# Altium PCB driverV1.2.PcbDoc (part 1 of 2)
Units mil, origin at the board's own origin, x right, y up, seen from the top; angles counter-clockwise.
Board outline 6000 x 4000 mil, 2 copper layers (Top Layer, Bottom Layer); 172 components, 108 nets, 481 pads, 590 vias.
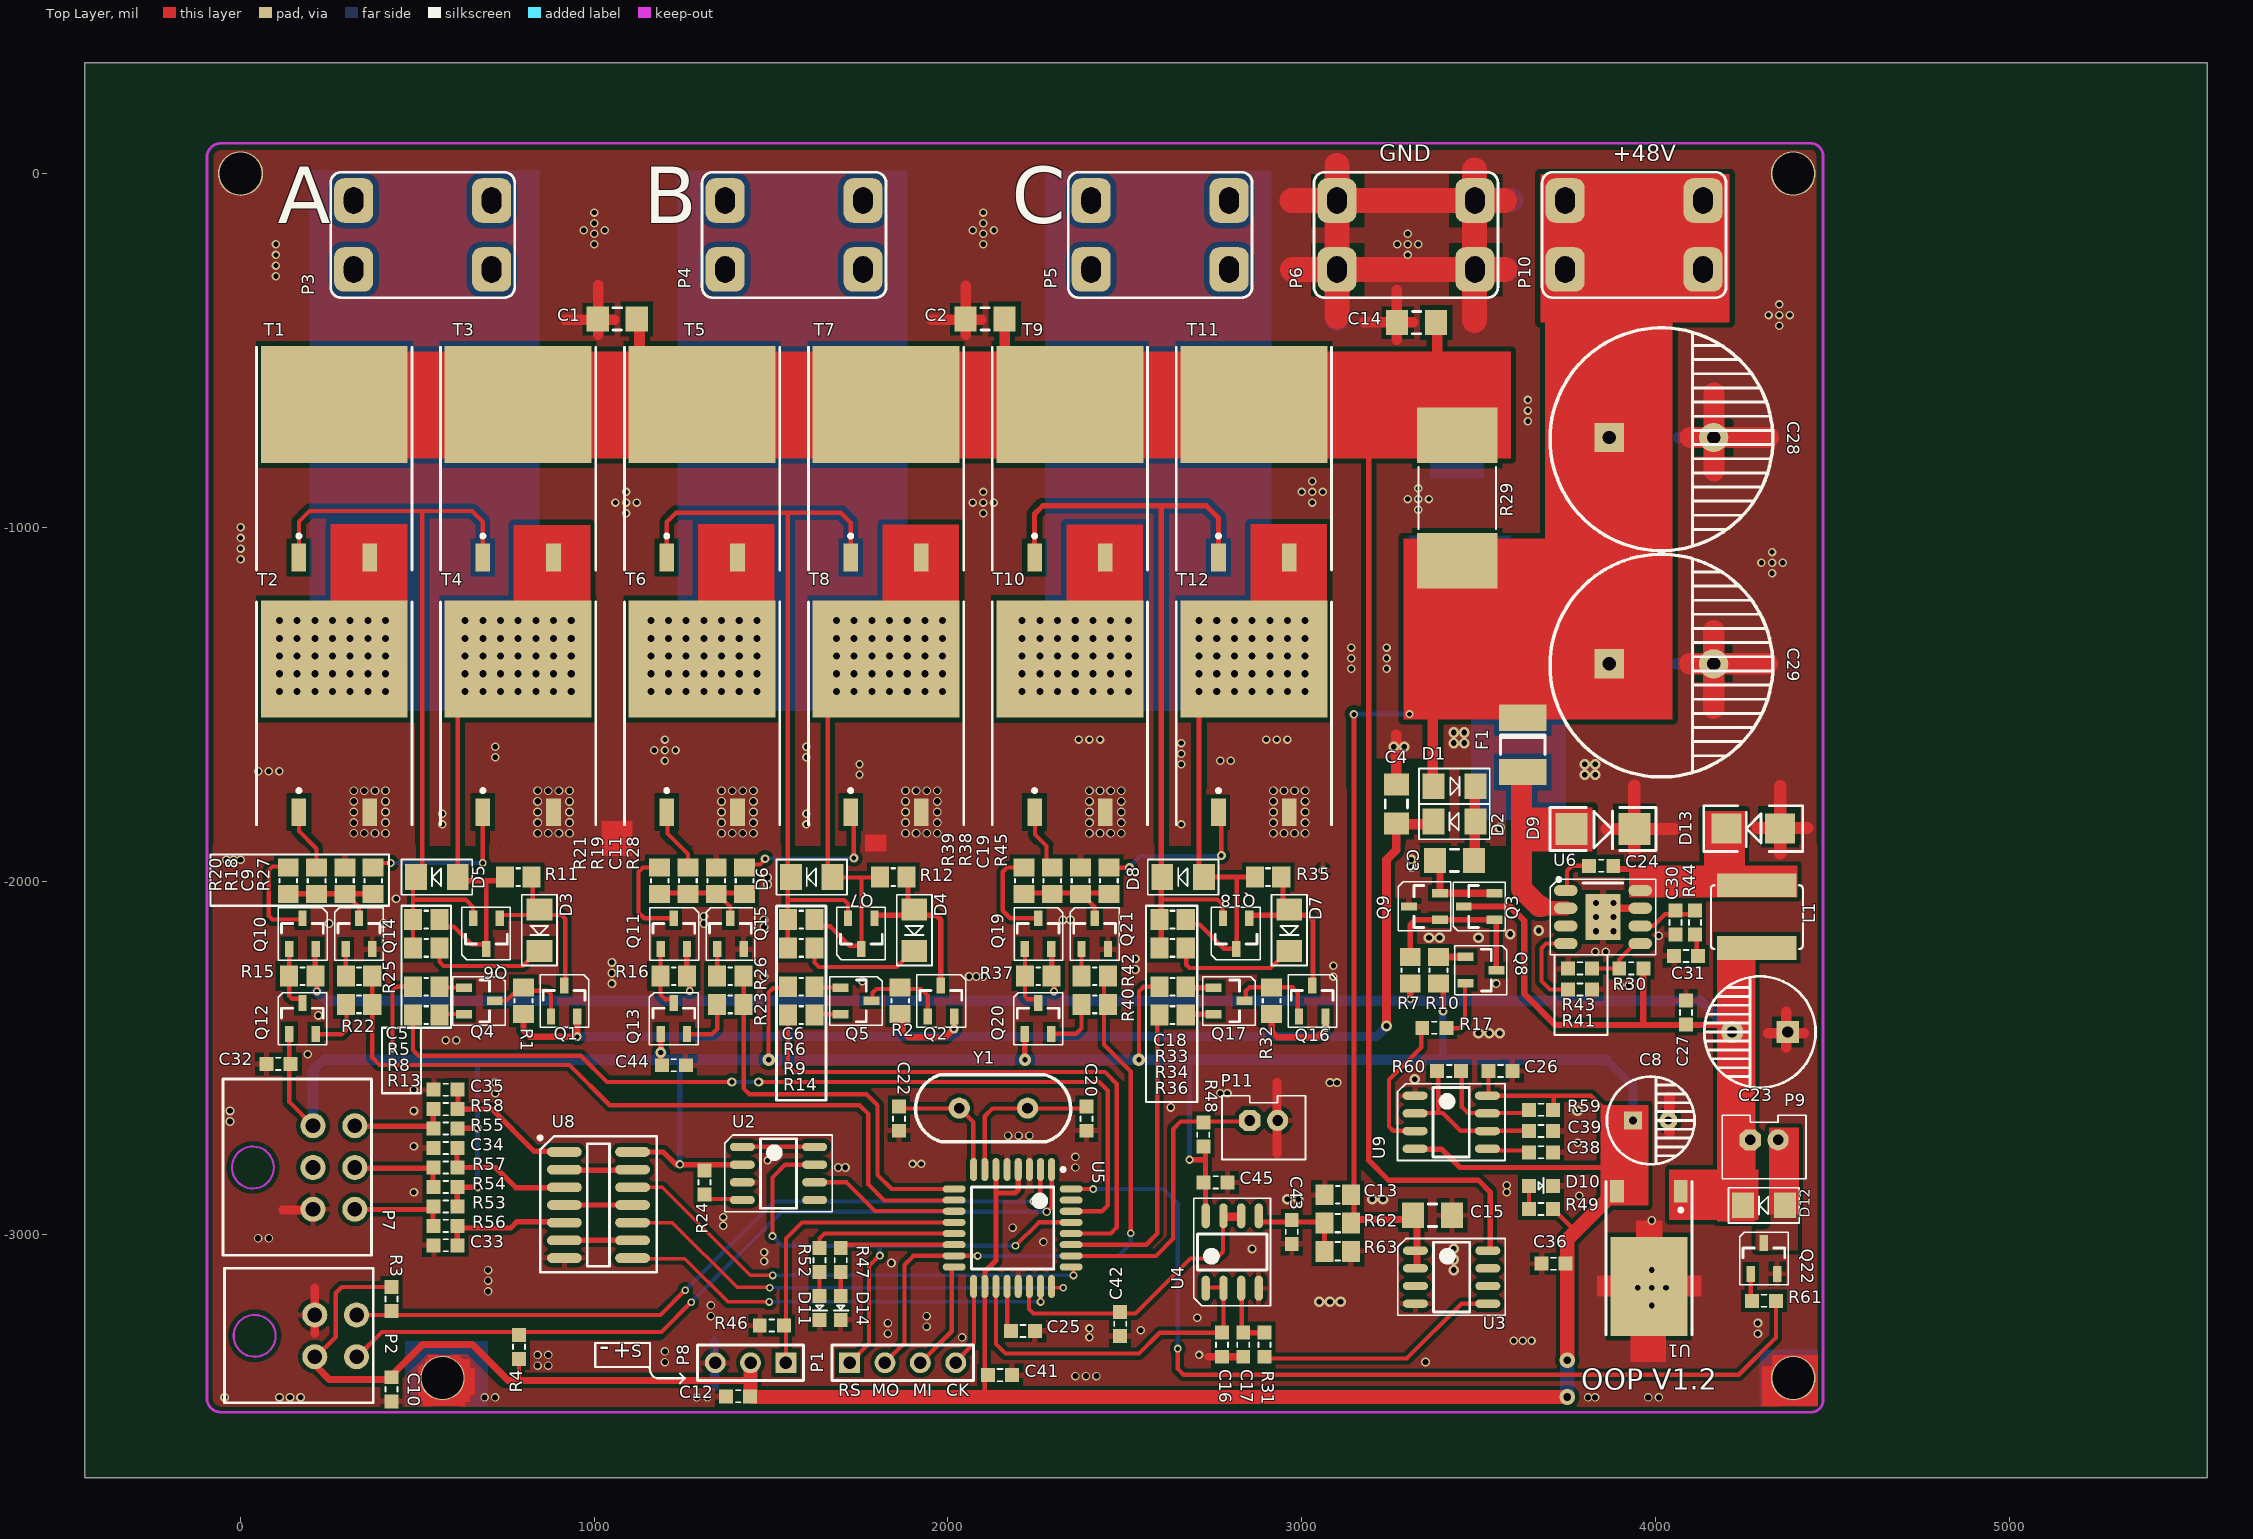
[diagram p0: Top Layer view]
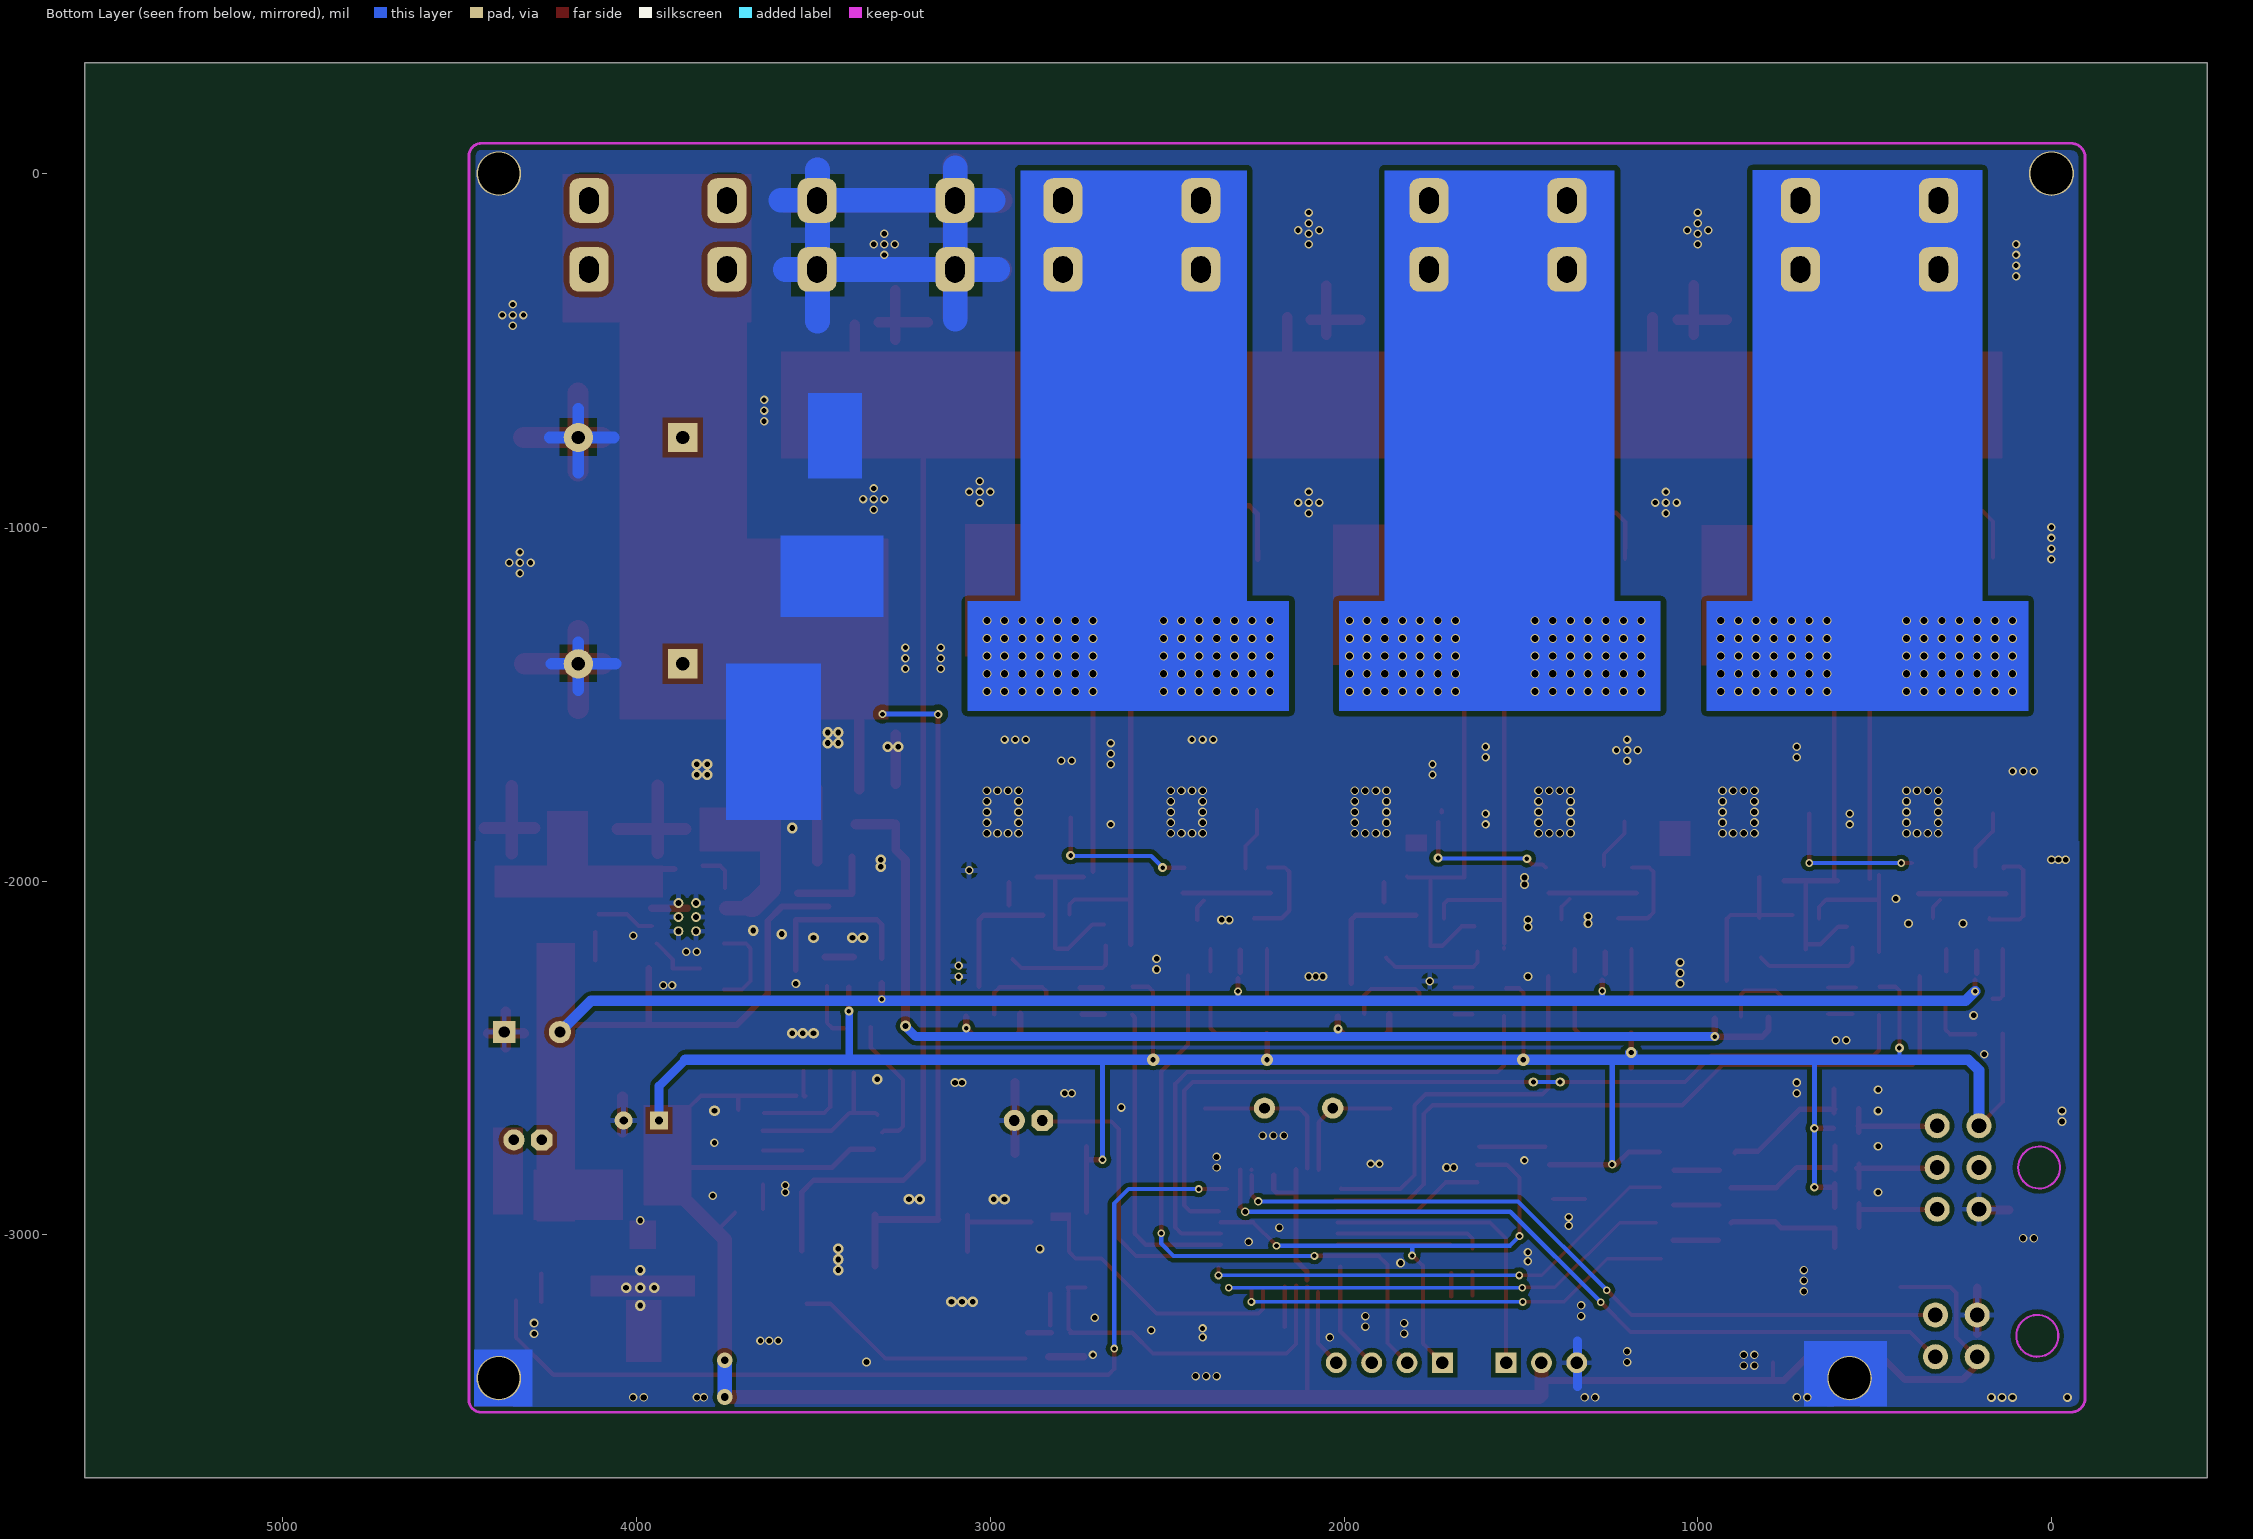
[diagram p1: Bottom Layer view, seen from below]

## Layer stack, top to bottom
Top Solder: solder mask 0.4, Solder Resist, Dk 3.5
Top Layer: signal copper 1.4
Dielectric1: dielectric 12.6, FR-4, Dk 4.8
Bottom Layer: signal copper 1.4
Bottom Solder: solder mask 0.4, Solder Resist, Dk 3.5

## Board outline
-440,-3687 5560,-3687 5560,313 -440,313

## Design rules (kind name [scope] priority, off if disabled: settings)
Clearance [All] p1 off: gap=15
ComponentClearance [All] p1 off: gap=0 collisioncheckmode=3 verticalgap=0 showdistances=FALSE
FabricationTestPointUsage TestPointUsage [All] p1: valid=0 allowmultiple=FALSE
FabricationTestpoint Testpoint [All] p1: side=3 testpointundercomponent=TRUE minsize=40 maxsize=100 preferedsize=60 minholesize=0 maxholesize=40 preferedholesize=32 testpointgrid=1 allowsidetop=TRUE allowsidebottom=TRUE usegrid=TRUE gridtolerance=0.01
HoleSize [All] p1: absolutevalues=TRUE maxlimit=200 minlimit=1 maxpercent=80.000 minpercent=20.000
PolygonConnect [All] p1: connectstyle=Direct reliefconductorwidth=15 reliefentries=4 polygonreliefangle="90 Angle" airgapwidth=10
RoutingVias [All] p1: holewidth=13 width=22 viastyle="Through Hole" minholewidth=10 minwidth=15 maxholewidth=200 maxwidth=250
SolderMaskExpansion [All] p1: expansion=4
Width [All] p1: maxlimit=150 minlimit=10 preferedwidth=10 minimp=50.000000 maximp=50.000000 favimp=50.000000
26 further rules are at their usual default settings.

## Components (designator, comment, footprint, x,y, rotation, side; value= is the part's Value field where it differs from the comment)
C1 "Cap" 3216[1206] 1065,-411 r180 top
C2 "Cap" 3216[1206] 2105,-411 r180 top
C3 "Cap" 3216[1206] 3432,-1942 r180 top
C4 "Cap" 3216[1206] 3267.71,-1782 r90 top
C5 "Cap" R0805 525,-2109 r0 top
C6 "Cap" R0805 1585,-2109 r0 top
C8 "Cap Pol1" C6.3*12 4037,-2677 r180 top
C9 "Cap" R0805 295,-1999 r270 top
C10 "Cap" 0603 427,-3437 r90 top
C11 "Cap" R0805 1345,-1999 r270 top
C12 "Cap" 0603 1407,-3457 r0 top
C13 "Cap" R0805 3102,-2887 r0 top
C14 "Cap" 3216[1206] 3325,-421 r180 top
C15 "Cap" 3216[1206] 3370,-2945 r0 top
C16 "Cap" 0603 2775,-3311 r90 top
C17 "Cap" 0603 2835,-3311 r90 top
C18 "Cap" R0805 2635,-2109 r0 top
C19 "Cap" R0805 2375,-1999 r270 top
C20 "Cap" 0603 2392,-2672 r270 top
C22 "Cap" 0603 1862,-2672 r270 top
C23 "Cap Pol3" C8x4 4217,-2427 r0 top
C24 "Cap" 0603 3847,-1957 r180 top
C25 "Cap" 0603 2212,-3272 r0 top
C26 "Cap" 0603 3562,-2537 r180 top
C27 "Cap" 0603 4087,-2372 r90 top
C28 "Cap Pol1" C16-7.5 4165,-1386 r180 top
C29 "Cap Pol1" C16-7.5 4165,-746 r180 top
C30 "Cap" 0603 4057,-2117 r270 top
C31 "Cap" 0603 4087,-2212 r0 top
C32 "Cap" 0603 107,-2517 r180 top
C33 "Cap" 0603 580,-3030 r0 top
C34 "Cap" 0603 580,-2755 r0 top
C35 "Cap" 0603 580,-2590 r0 top
C36 "Cap" 0603 3712,-3082 r180 top
C38 "Cap" 0603 3677,-2767 r0 top
C39 "Cap" 0603 3677,-2707 r0 top
C41 "Cap" 0603 2147,-3397 r180 top
C42 "Cap" 0603 2487,-3252 r90 top
C43 "Cap" 0603 2972,-2992 r90 top
C44 "Cap" 0603 1225,-2521 r180 top
C45 "Cap" 0603 2757,-2852 r180 top
D1 "Diode" LL34 3432,-1732 r0 top
D2 "Diode" LL34 3432,-1832 r180 top
D3 "Diode" LL34 845,-2139 r270 top
D4 "Diode" LL34 1905,-2139 r270 top
D5 "Zener diode" LL34 555,-1989 r180 top
D6 "Zener diode" LL34 1615,-1989 r180 top
D7 "Diode" LL34 2965,-2139 r270 top
D8 "Zener diode" LL34 2665,-1989 r180 top
D9 "SMBJ45CA" SMB 3852,-1852 r0 top
D10 "WORK" 0603-LED 3677,-2862 r0 top
D11 "FALT" 0603-LED 1637,-3207 r270 top
D12 "Diode" LL34 4307,-2917 r180 top
D13 "SS54" SMA 4277,-1852 r180 top
D14 "FALT" 0603-LED 1697,-3207 r270 top
F1 "Fuse Thermal" 1812 3625,-1615 r270 top
L1 "Inductor" L-6045 4287,-2012 r270 top
P1 "PROG" HDR1X4 1722,-3362 r0 top
P2 "ENC" 5557-4-SMALL 210,-3345 r270 top
P3 "M5" M4 710,-76 r180 top
P4 "M5" M4 1760,-76 r180 top
P5 "M5" M4 2795,-76 r180 top
P6 "M5" M4 3490,-76 r180 top
P7 "HALL" 5557-6-small 205,-2810 r270 top
P8 "S1" HDR1X3 1542,-3362 r180 top
P9 "FAN" PH2.0-2P 4347,-2732 r0 top
P10 "M5" M4 4135,-76 r180 top
P11 "RT" PH2.0-2P 2932,-2677 r0 top
Q1 "PNP" SOT-23-PNP 915,-2339 r0 top
Q2 "PNP" SOT-23-PNP 1980,-2339 r0 top
Q3 "NPN" SOT-23-NPN 3502,-2072 r90 top
Q4 "NPN" SOT-23-NPN 675,-2339 r270 top
Q5 "NPN" SOT-23-NPN 1740,-2339 r270 top
Q6 "PNP" SOT-23-PNP 695,-2149 r180 top
Q7 "PNP" SOT-23-PNP 1755,-2149 r180 top
Q8 "NPN" SOT-23-NPN 3507,-2252 r270 top
Q9 "PNP" SOT-23-PNP 3347,-2072 r90 top
Q10 "PNP" SOT-23-PNP 175,-2149 r0 top
Q11 "PNP" SOT-23-PNP 1225,-2149 r0 top
Q12 "NPN" SOT-23-NPN 175,-2389 r0 top
Q13 "NPN" SOT-23-NPN 1225,-2389 r0 top
Q14 "NPN" SOT-23-NPN 335,-2149 r0 top
Q15 "NPN" SOT-23-NPN 1385,-2149 r0 top
Q16 "PNP" SOT-23-PNP 3030,-2339 r0 top
Q17 "NPN" SOT-23-NPN 2795,-2339 r270 top
Q18 "PNP" SOT-23-PNP 2815,-2149 r180 top
Q19 "PNP" SOT-23-PNP 2255,-2149 r0 top
Q20 "NPN" SOT-23-NPN 2255,-2389 r0 top
Q21 "NPN" SOT-23-NPN 2415,-2149 r0 top
Q22 "NPN" SOT-23-NPN 4307,-3067 r0 top
R1 "Res1" R0805 800,-2339 r270 top
R2 "Res1" R0805 1865,-2339 r270 top
R3 "Res1" 0603 427,-3182 r270 top
R4 "Res1" 0603 787,-3317 r90 top
R5 "Res1" R0805 525,-2189 r180 top
R6 "Res1" R0805 1585,-2189 r180 top
R7 "Res1" R0805 3307,-2252 r270 top
R8 "Res1" R0805 525,-2299 r180 top
R9 "Res1" R0805 1585,-2299 r180 top
R10 "Res1" R0805 3387,-2252 r270 top
R11 "Res1" R0805 785,-1989 r0 top
R12 "Res1" R0805 1845,-1989 r0 top
R13 "Res1" R0805 525,-2379 r0 top
R14 "Res1" R0805 1585,-2379 r0 top
R15 "Res1" R0805 175,-2269 r180 top
R16 "Res1" R0805 1225,-2269 r180 top
R17 "Res1" 0603 3375,-2415 r0 top
R18 "Res1" R0805 215,-1999 r270 top
R19 "Res1" R0805 1265,-1999 r270 top
R20 "Res1" R0805 135,-1999 r270 top
R21 "Res1" R0805 1185,-1999 r270 top
R22 "Res1" R0805 335,-2349 r180 top
R23 "Res1" R0805 1385,-2349 r180 top
R24 "Res1" 0603 1312,-2852 r90 top
R25 "Res1" R0805 335,-2269 r0 top
R26 "Res1" R0805 1385,-2269 r0 top
R27 "Res1" R0805 375,-1999 r270 top
R28 "Res1" R0805 1425,-1999 r270 top
R29 "" 3920 3440,-740 r270 top
R30 "Res1" 0603 3932,-2247 r0 top
R31 "Res1" 0603 2895,-3311 r270 top
R32 "Res1" R0805 2915,-2339 r270 top
R33 "Res1" R0805 2635,-2189 r180 top
R34 "Res1" R0805 2635,-2299 r180 top
R35 "Res1" R0805 2905,-1989 r0 top
R36 "Res1" R0805 2635,-2379 r0 top
R37 "Res1" R0805 2255,-2269 r180 top
R38 "Res1" R0805 2295,-1999 r270 top
R39 "Res1" R0805 2215,-1999 r270 top
R40 "Res1" R0805 2415,-2349 r180 top
R41 "Res1" 0603 3787,-2307 r0 top
R42 "Res1" R0805 2415,-2269 r0 top
R43 "Res1" 0603 3787,-2247 r0 top
R44 "Res1" 0603 4112,-2117 r270 top
R45 "Res1" R0805 2455,-1999 r270 top
R46 "Res1" 0603 1502,-3257 r180 top
R47 "Res1" 0603 1697,-3072 r90 top
R48 "Res1" 0603 2722,-2717 r270 top
R49 "Res1" 0603 3677,-2927 r0 top
R52 "Res1" 0603 1637,-3072 r90 top
R53 "Res Semi" 0603 580,-2920 r0 top
R54 "Res Semi" 0603 580,-2865 r0 top
R55 "Res Semi" 0603 580,-2700 r0 top
R56 "Res Semi" 0603 580,-2975 r180 top
R57 "Res Semi" 0603 580,-2810 r180 top
R58 "Res Semi" 0603 580,-2645 r180 top
R59 "Res1" 0603 3677,-2647 r0 top
R60 "Res1" 0603 3417,-2537 r0 top
R61 "Res Semi" 0603 4307,-3187 r0 top
R62 "Res1" 0805 3102,-2967 r0 top
R63 "Res1" 0805 3102,-3047 r0 top
T1 "CSD19536" D2PAK 265,-869 r0 top
T2 "CSD19536" D2PAK 265,-1589 r0 top
T3 "CSD19536" D2PAK 785,-869 r0 top
T4 "CSD19536" D2PAK 785,-1589 r0 top
T5 "CSD19536" D2PAK 1305,-869 r0 top
T6 "CSD19536" D2PAK 1305,-1589 r0 top
T7 "CSD19536" D2PAK 1825,-869 r0 top
T8 "CSD19536" D2PAK 1825,-1589 r0 top
T9 "CSD19536" D2PAK 2345,-869 r0 top
T10 "CSD19536" D2PAK 2345,-1589 r0 top
T11 "CSD19536" D2PAK 2865,-869 r0 top
T12 "CSD19536" D2PAK 2865,-1589 r0 top
U1 "L7805ACD2T-TR" TO-252 3962,-3097 r180 top
U2 "MAX706RCSA" SOIC8 1522,-2827 r0 top
U3 "MAX4080T" SOIC8 3425,-3120 r0 top
U4 "LM358D" SOIC8 2804,-3048 r90 top
U5 "ATmega8-16AC" 32A_N 2183,-2981 r270 top
U6 "TPS54360" SOP8-POW 3852,-2102 r0 top
U8 "MC74HC14AD" 751A 1012,-2916 r0 top
U9 "NE555D" SOIC8 3424,-2682 r0 top
Y1 "XTAL(8M)" 49SD 2032,-2642 r0 top

## Footprints (in the part's own frame and the unit in brackets; to place one, negate y for a bottom-side part, rotate by r counter-clockwise, add the part's x,y. Pads: shape width x height; smd on the part's side, far side on the other; paste and mask are expansions set on the pad)
32A_N [mm] "32-Pin Thin Quad Flat Pack 0.8 mm Pitch, IPC Medium Density"
  oval 1.65x0.508 smd: 1(-4.2,2.8) 2(-4.2,2) 3(-4.2,1.2) 4(-4.2,0.4) 5(-4.2,-0.4) 6(-4.2,-1.2) 7(-4.2,-2) 8(-4.2,-2.8) 17(4.2,-2.8) 18(4.2,-2) 19(4.2,-1.2) 20(4.2,-0.4) 21(4.2,0.4) 22(4.2,1.2) 23(4.2,2) 24(4.2,2.8)
  oval 0.508x1.65 smd: 9(-2.8,-4.2) 10(-2,-4.2) 11(-1.2,-4.2) 12(-0.4,-4.2) 13(0.4,-4.2) 14(1.2,-4.2) 15(2,-4.2) 16(2.8,-4.2) 25(2.8,4.2) 26(2,4.2) 27(1.2,4.2) 28(0.4,4.2) 29(-0.4,4.2) 30(-1.2,4.2) 31(-2,4.2) 32(-2.8,4.2)
  silkscreen extent -4.32,-2.95 2.95,3.75, body extent -3.5,-3.5 3.5,3.5, height 1.2
49SD [mil]
  round 60 hole 30: 1(0,0) 2(193,0)
  silkscreen extent -124,-95 315,94
0603 [mm]
  rect 1x1 smd: 1(-0.864,0) 2(0.864,0)
  silkscreen extent -0.18,-0.43 0.18,0.43
0603-LED [mm]
  rect 1x1 smd: 1(-0.864,0) 2(0.864,0)
  silkscreen extent -0.18,-0.51 0.18,0.56
751A [mm]
  oval 2.5x0.7 smd: 1(-2.45,3.81) 2(-2.45,2.54) 3(-2.45,1.27) 4(-2.45,0) 5(-2.45,-1.27) 6(-2.45,-2.54) 7(-2.45,-3.81) 8(2.45,-3.81) 9(2.45,-2.54) 10(2.45,-1.27) 11(2.45,0) 12(2.45,1.27) 13(2.45,2.54) 14(2.45,3.81)
  silkscreen extent -4.31,-4.83 4.19,4.95, body extent -2,-4.38 2,4.38, height 1.75
0805 [mm]
  rect 1.3x1.5 smd: 1(-0.95,0) 2(0.95,0)
  silkscreen extent -0.15,-0.66 0.15,0.66
1812 [mm] "Chip Capacitor; Body 4.5 x 3.2 mm (LxW typ)"
  rect 1.9x3.4 smd: 1(-1.95,0) 2(1.95,0)
  silkscreen extent -0.7,-1.6 0.7,1.6
3216[1206] [mm] "Chip Resistor; Body 3.2 x 1.6 mm (LxW typ)"
  rect 1.6x1.8 smd: 1(-1.4,0) 2(1.4,0)
  silkscreen extent -0.3,-0.8 0.3,0.8
3920 [mm]
  rect 4x5.8 smd: 1(0,0) 2(9,0)
  silkscreen extent 2.29,-2.79 6.73,2.79
5557-4-SMALL [mm]
  round 1.8 hole 1.05: 1(0,0) 2(-3,0) 3(-3,3) 4(0,3)
  Keep-Out Layer circle w0.152: c-1.5,-4.32 r1.505
  silkscreen extent -6.35,-6.48 3.3,4.19
5557-6-small [mm]
  round 1.8 hole 1.05: 1(3,0) 2(0,0) 3(-3,0) 4(-3,3) 5(0,3) 6(3,3)
  Keep-Out Layer circle w0.152: c0,-4.32 r1.505
  silkscreen extent -6.35,-6.48 6.3,4.19
C6.3*12 [mm]
  rect 1.3x1.3 hole 0.6: 1(2.54,0)
  round 1.3 hole 0.6: 2(0,0)
  silkscreen extent -1.88,-3.15 4.42,3.15
C8x4 [mm]
  round 1.6 hole 0.8: 1(0,0)
  rect 1.6x1.6 hole 0.8: 2(4,0)
  silkscreen extent -2,-4 6,4
C16-7.5 [mm]
  rect 2.1x2.1 hole 0.95: 1(7.5,0)
  round 2.1 hole 0.95: 2(0,0)
  silkscreen extent -4.25,-7.87 11.75,8.12
D2PAK [mm] "D2-PAK/TO-263-AB; 3 Leads (1 Cropped); Body 15.5 (inc. leads) x 10.5 mm (LxW max)"
  rect 1.05x2 smd: 1(-2.54,-5.5) 3(2.54,-5.5)
  rect 10.55x8.4 smd: 2(0,5.5)
  silkscreen extent -5.58,-6.4 5.58,9.6
HDR1X3 [mm] "Connector; Header; 3 Position"
  rect 1.5x1.5 hole 0.9: 1(0,0)
  round 1.5 hole 0.9: 2(2.54,0) 3(5.08,0)
  silkscreen extent -1.27,-1.27 6.35,1.27
HDR1X4 [mm] "Connector; Header; 4 Position"
  rect 1.5x1.5 hole 0.9: 1(0,0)
  round 1.5 hole 0.9: 2(2.54,0) 3(5.08,0) 4(7.62,0)
  silkscreen extent -1.27,-1.27 8.89,1.27
L-6045 [mm]
  rect 1.7x5.7 smd: 1(0,0) 2(4.5,0)
  silkscreen extent 0,-3.3 4.57,3.3
LL34 [mm] "MELF Diode, 2-Leads, Body 3.3x1.6mm, IPC Medium Density"
  rect 1.575x1.85 smd: 1(-1.5,0) 2(1.5,0)
  silkscreen extent -2.54,-1.27 2.54,1.27, body extent -1.65,-0.82 1.65,0.82, height 1.65
M4 [mm]
  rrect50% 2.8x3.2 hole 1.4 slot 1.9 at 90 deg: 1(0,4.953) 1(0,0) 1(9.906,0) 1(9.906,4.953)
  silkscreen extent -1.65,-2.03 11.56,6.99
PH2.0-2P [mil]
  oct 60x60 hole 30: 1(-78.74,0)
  round 60 hole 30: 2(0,0)
  silkscreen extent -157,-110 79,70
R0805 [mm] "Chip Resistor, 2-Leads, Body 2.0x1.3mm, IPC Medium Density"
  rect 1.298x1.501 smd: 1(-0.95,0) 2(0.95,0)
  silkscreen extent -0.13,-0.64 0.13,0.64
SMA [mm] "Molded Diode, 2-Leads, Body 4.3x2.7mm, IPC Medium Density"
  rect 2.15x2.15 smd: 1(-1.93,0) 2(1.93,0)
  silkscreen extent -3.56,-1.65 3.56,1.65, body extent -2.28,-1.42 2.29,1.42, height 2.95
SMB [mm]
  rect 2.3x2.3 smd: 1(-2.25,-0.025) 2(2.25,-0.025)
  silkscreen extent -3.8,-1.58 3.81,1.52
SOIC8 [mm]
  oval 1.8x0.6 smd: 1(-2.625,1.905) 2(-2.625,0.635) 3(-2.625,-0.635) 4(-2.625,-1.905) 5(2.575,-1.905) 6(2.575,-0.635) 7(2.575,0.635) 8(2.575,1.905)
  silkscreen extent -3.89,-2.74 3.84,2.77, body extent -2.03,-2.5 1.97,2.5, height 1.76
SOP8-POW [mm]
  round 0.715 hole 0.45: 0(-0.508,-1.016) 0(-0.508,0) 0(-0.508,1.016) 0(0.762,-1.016) 0(0.762,0) 0(0.762,1.016)
  rect 2.54x3.302 smd: 0(0,0)
  oval 1.7x0.8 smd: 1(-2.675,1.905) 2(-2.675,0.635) 3(-2.675,-0.635) 4(-2.675,-1.905) 5(2.675,-1.905) 6(2.675,-0.635) 7(2.675,0.635) 8(2.675,1.905)
  silkscreen extent -3.78,-2.7 3.77,2.82
SOT-23-NPN [mm]
  rect 0.6x1.143 smd: 1(0.95,-1.108) 2(-0.95,-1.108) 3(0,1.108)
  silkscreen extent -1.75,-1.89 1.75,1.87, body extent -1.5,-0.66 1.5,0.74, height 1.1
SOT-23-PNP [mm]
  rect 0.6x1.143 smd: 1(0.95,-1.108) 2(-0.95,-1.108) 3(0,1.108)
  silkscreen extent -1.73,-1.89 1.78,1.87, body extent -1.5,-0.66 1.5,0.74, height 1.1
TO-252 [mm]
  rect 1x1.6 smd: 1(-2.793,-5.584) 3(1.777,-5.584)
  rect 5.5x7.1 smd: 4(-0.508,1.266)
  silkscreen extent -3.59,-6.28 2.58,4.72

## Part data
C1 C2 C3 C4 C5 C6 C9 C10 C11 C12 C13 C14 C15 C16 C17 C18 C19 C20 C22 C24 C25 C26 C27 C30 C31 C32 C33 C34 C35 C36 C38 C39 C41 C42 C43 C44 C45: "Capacitor"
C8 C28 C29: "Polarized Capacitor (Radial)"
C23: library part Cap, "Capacitor"
D1 D2 D3 D4 D7 D12: library part "Diode 1N5408", "3 Amp Medium Power Silicon Rectifier Diode"
D5 D6 D8: library part "D Zener", "Zener Diode"
D9: library part NUP2105L
D10 D11 D14: library part LED2, "Typical RED, GREEN, YELLOW, AMBER GaAs LED"
D13: library part "Diode BAS16", "Silicon Switching Diode for High-Speed Switching"
F1: "Thermal Fuse"
L1: library part B82793S0513N201
P1 P7: library part "Header 5", "Header, 5-Pin"
P2: library part "Header 4", "Header, 4-Pin"
P6 P9 P11: library part "Header 2", "Header, 2-Pin"
P8: library part "Header 3", "Header, 3-Pin"
Q1 Q2 Q6 Q7 Q9 Q10 Q11 Q16 Q18 Q19: library part 2N5401, "PNP General Purpose Amplifier"
Q3 Q4 Q5 Q8 Q12 Q13 Q14 Q15 Q17 Q20 Q21 Q22: library part 2N5551, "NPN General Purpose Amplifier"
R1 R2 R3 R4 R5 R6 R7 R8 R9 R10 R11 R12 R13 R14 R15 R16 R17 R18 R19 R20 R21 R22 R23 R24 R25 R26 R27 R28 R30 R31 R32 R33 R34 R35 R36 R37 R38 R39 R40 R42 R45 R46 R47 R48 R49 R52 R59 R60 R62 R63: "Resistor"
R29: library part Res1, "Resistor"
R41 R43 R44: library part "Res Semi", "Semiconductor Resistor"
R53 R54 R55 R56 R57 R58 R61: "Semiconductor Resistor"
T1 T2 T3 T4 T5 T6 T7 T8 T9 T10 T11 T12: library part IRF644S, "HEXFET N-Channel Power MOSFET"
U1: library part MC78M05ACDTRK, "Three-Terminal Medium Current Positive Voltage Regulator"
U2: "+3V Voltage Monitoring, Low-Cost, µP Supervisory Circuit"
U3: library part MAX4080
U4: "Dual Low-Power Operational Amplifier"
U5: "8-Bit AVR Microcontroller with 8K Bytes of In-System Programmable Flash Memory"
U6: library part TJA1040
U8: "Hex Schmitt-Trigger Inverter"
U9: "Precision Timer"
Y1: library part XTAL, "Crystal Oscillator"

## Free pads (board coordinates)
  round 125.98 hole 118.11: 0(570.87,-3405.51) 1(4389.76,-3405.51) 2(4389.76,0)
  oval 127.17x125.98 hole 118.11: 3(0,0)

## Via types
v1: diameter 25, hole 20, Top Layer to Bottom Layer, 210 vias
v2: diameter 24, hole 15, Top Layer to Bottom Layer, 121 vias
v3: diameter 25, hole 18, Top Layer to Bottom Layer, 84 vias
v4: diameter 25, hole 16, Top Layer to Bottom Layer, 57 vias
v5: diameter 30, hole 16, Top Layer to Bottom Layer, 38 vias
v6: diameter 24, hole 17, Top Layer to Bottom Layer, 36 vias
v7: diameter 22, hole 13, Top Layer to Bottom Layer, 21 vias
v8: diameter 25, hole 13, Top Layer to Bottom Layer, 9 vias
v9: diameter 35, hole 15, Top Layer to Bottom Layer, 3 vias
v10: diameter 24, hole 13, Top Layer to Bottom Layer, 3 vias
v11: diameter 45, hole 22, Top Layer to Bottom Layer, 2 vias
v12: diameter 26, hole 14, Top Layer to Bottom Layer, 2 vias
v13: diameter 30, hole 15, Top Layer to Bottom Layer, 1 vias
v14: diameter 30, hole 17, Top Layer to Bottom Layer, 1 vias
v15: diameter 23, hole 13, Top Layer to Bottom Layer, 1 vias
v16: diameter 25, hole 14, Top Layer to Bottom Layer, 1 vias

## Nets (pads, with @x,y where several pads share a name; then routed paths per layer and width w, separated by ;. In a path a pad name is that pad's centre, name@x,y a point inside that pad or via, vN(x,y) a via of type N, cw(c..) or ccw(c..) an arc to the next point about the centre after c; other vN are vias at no path point)
+5V: C8.1 C10.2 C12.2 C26.2 C32.1 C36.1 C41.2 C44.2 C45.2 P2.1 P7.3 P8.2 Q12.2 Q13.2 Q20.2 R3.1 R4.1 R8.2 R9.2 R10.2 R24.2 R34.2 R48.2 R49.2 R53.2 R54.2 R55.2 R59.2 U1.3 U2.2 U4.8 U5.4 U5.6 U5.18 U8.14 U9.4 U9.8 | length 13691
  Top Layer w12: Q12.2@137.99,-2432.64 Q12.2@138,-2432 ; Q12.2@138,-2431 138,-2624.89 P7.3 ; P2.1@213,-3345 269,-3289 269,-3165 286,-3148 R3.1 ; v8(430,-2472) 430,-2310 441,-2299 R8.2@486,-2299 ; 787,-3412 R4.1@787,-3362 ; v9(1493,-2505) 1493,-2315 1505,-2303 R9.2@1542,-2303 ; 2104.26,-3459 U5.18 ; v9(2540,-2505) 2540,-2312 2553,-2299 R34.2 ; U9.8@3528,-2606 C26.2 ; U9.8@3549,-2607 3818,-2607 3853,-2642 ; R59.2@3713,-2647 3713,-2607 ; R49.2@3722,-2938 3770.08,-2986.08
  Top Layer w15: R53.2@613,-2922 R54.2@613,-2855 ; R54.2@615,-2866 v10(670,-2866) ; R55.2@616,-2699 v10(670,-2699) ; U8.14 1195,-2766 1231,-2802 U2.2 ; C44.2@1188,-2528 Q13.2@1188,-2430 ; U5.18@2105,-3128 2105,-3104 2135.76,-3073.24 U5.6 ; 2140.26,-2882 2190,-2882 2199,-2873 U5.4@2199,-2831 ; v9@2217.6,-2505 Q20.2@2217.6,-2436 ; Q20.2@2218.92,-2432.7 Q20.2@2219,-2431 ; v10(2683,-2788) 2722,-2788 ; U4.8@2728,-2937 R48.2@2728,-2751 ; U9.4@3331,-2758 3395.73,-2758 3447.73,-2810 3875,-2810 ; v8@3400,-2367 R10.2@3400,-2300 ; U9.8@3524.36,-2608 U9.8@3526,-2608
  Top Layer w20: P2.1 213,-3345 P2.1@213,-3337 ; P2.1@216,-3350 216,-3374 251,-3409 416,-3409 515,-3310 655,-3310 757,-3412 1447.51,-3412
  Top Layer w40: P8.2 1442,-3453 1448,-3459 v11(3751,-3459) ; v11(3751,-3355) 3751,-3014 U1.3@3877,-2888
  Bottom Layer w12: 430,-2505 v8(430,-2472)
  Bottom Layer w15: v10(670,-2866) 670,-2515 ; v16(1242,-2801) 1242,-2518 ; v10(2683,-2788) 2683,-2517
  Bottom Layer w20: 3399,-2505 v8@3399,-2368
  Bottom Layer w25: 3862,-2505 3937,-2580 C8.1
  Bottom Layer w30: P7.3 205,-2535 235,-2505 3862,-2505
  Bottom Layer w40: v11(3751,-3459) v11(3751,-3355)
  other v8: 3400,-2368
  other v9: 2218,-2505
  other v13: 1188,-2485
+12V: C23.1 C27.1 D12.2 L1.2 P9.1 Q3.3 Q10.1 Q11.1 Q19.1 R7.2 R15.1 R16.1 R30.2 R37.1 U1.1 | length 5604.5
  Top Layer w15: R15.1@211.6,-2261.04 Q10.1@211.6,-2198.64 ; v7@216,-2313 R15.1@216,-2281 ; R16.1@1261.6,-2263.04 Q11.1@1261.6,-2200.64 ; v7(1270,-2311) R16.1@1270,-2280 ; R37.1@2293.4,-2258.36 Q19.1@2293.4,-2195.96 ; v7(2300,-2312) R37.1@2300,-2276.6
  Top Layer w18: v7(3307,-2334) R7.2 ; Q3.3 3589,-2072 3629,-2112 3629,-2319 3717,-2407 C23.1@4206,-2407 ; 3966,-2405 R30.2
  Bottom Layer w15: 1270,-2341 v7(1270,-2311) ; 2300,-2342 v7(2300,-2312)
  Bottom Layer w30: v7(216,-2312) 243,-2339 4129,-2339 C23.1
A: C5.2 D5.1 P3.1 Q6.3 R11.1 T1.3 T2.2 T3.3 T4.2 | length 992.9
  Top Layer w12: C5.2@579,-2129 603,-2129 653,-2179 Q6.3@694,-2179 ; D5.1@614.06,-1999 T4.2@614.06,-1485.06 ; Q6.3 695,-1999
  Top Layer w15: D5.1@606.06,-1999 R11.1@755.69,-1999
  other v1: 110,-1464 160,-1464 210,-1464 260,-1464 310,-1464 360,-1464 410,-1464 635,-1464 685,-1464 735,-1464 785,-1464 835,-1464 885,-1464 935,-1464 110,-1414 160,-1414 210,-1414 260,-1414 310,-1414 360,-1414 410,-1414 635,-1414 685,-1414 735,-1414 785,-1414 835,-1414 885,-1414 935,-1414 110,-1364 160,-1364 210,-1364 260,-1364 310,-1364 360,-1364 410,-1364 635,-1364 685,-1364 735,-1364 785,-1364 835,-1364 885,-1364 935,-1364 110,-1314 160,-1314 210,-1314 260,-1314 310,-1314 360,-1314 410,-1314 635,-1314 685,-1314 735,-1314 785,-1314 835,-1314 885,-1314 935,-1314 110,-1264 160,-1264 210,-1264 260,-1264 310,-1264 360,-1264 410,-1264 635,-1264 685,-1264 735,-1264 785,-1264 835,-1264 885,-1264 935,-1264
B: C6.2 D6.1 P4.1 Q7.3 R12.1 T5.3 T6.2 T7.3 T8.2 | length 979
  Top Layer w12: C6.2@1631,-2128 1667,-2128 1722,-2183 Q7.3@1755,-2183 ; T8.2@1660,-1513 1660,-1990 1819,-1990 R12.1@1822,-1987 ; Q7.3@1756,-2184 1756,-1992
  other v1: 1160,-1464 1210,-1464 1260,-1464 1310,-1464 1360,-1464 1410,-1464 1460,-1464 1685,-1464 1735,-1464 1785,-1464 1835,-1464 1885,-1464 1935,-1464 1985,-1464 1160,-1414 1210,-1414 1260,-1414 1310,-1414 1360,-1414 1410,-1414 1460,-1414 1685,-1414 1735,-1414 1785,-1414 1835,-1414 1885,-1414 1935,-1414 1985,-1414 1160,-1364 1210,-1364 1260,-1364 1310,-1364 1360,-1364 1410,-1364 1460,-1364 1685,-1364 1735,-1364 1785,-1364 1835,-1364 1885,-1364 1935,-1364 1985,-1364 1160,-1314 1210,-1314 1260,-1314 1310,-1314 1360,-1314 1410,-1314 1460,-1314 1685,-1314 1735,-1314 1785,-1314 1835,-1314 1885,-1314 1935,-1314 1985,-1314 1160,-1264 1210,-1264 1260,-1264 1310,-1264 1360,-1264 1410,-1264 1460,-1264 1685,-1264 1735,-1264 1785,-1264 1835,-1264 1885,-1264 1935,-1264 1985,-1264
BT_PWM: R17.1 U9.3 | length 384.7
  Top Layer w12: U9.3@3306,-2711 3301,-2706 3259,-2706 3247,-2694 3247,-2562 3338,-2471 R17.1@3338,-2413
C: C18.2 D8.1 P5.1 Q18.3 R35.1 T9.3 T10.2 T11.3 T12.2 | length 957.8
  Top Layer w12: C18.2@2679,-2123 2712,-2123 2780.4,-2191.4 Q18.3@2812.04,-2191.4 ; Q18.3@2816.4,-2190.36 2816.4,-1990
  Top Layer w15: D8.1@2710,-1972 T12.2@2710,-1507 ; D8.1@2736.96,-1988.6 R35.1@2868,-1988.6
  other v1: 2210,-1464 2260,-1464 2310,-1464 2360,-1464 2410,-1464 2460,-1464 2510,-1464 2710,-1464 2760,-1464 2810,-1464 2860,-1464 2910,-1464 2960,-1464 3010,-1464 2210,-1414 2260,-1414 2310,-1414 2360,-1414 2410,-1414 2460,-1414 2510,-1414 2710,-1414 2760,-1414 2810,-1414 2860,-1414 2910,-1414 2960,-1414 3010,-1414 2210,-1364 2260,-1364 2310,-1364 2360,-1364 2410,-1364 2460,-1364 2510,-1364 2710,-1364 2760,-1364 2810,-1364 2860,-1364 2910,-1364 2960,-1364 3010,-1364 2210,-1314 2260,-1314 2310,-1314 2360,-1314 2410,-1314 2460,-1314 2510,-1314 2710,-1314 2760,-1314 2810,-1314 2860,-1314 2910,-1314 2960,-1314 3010,-1314 2210,-1264 2260,-1264 2310,-1264 2360,-1264 2410,-1264 2460,-1264 2510,-1264 2710,-1264 2760,-1264 2810,-1264 2860,-1264 2910,-1264 2960,-1264 3010,-1264
CSA: C16.2 U4.1 U4.2 U5.19 | length 1007.4
  Top Layer w12: U5.19@2135,-3144 U5.19@2135.04,-3146.37 ; U5.19@2136,-3149 2136,-3309 2163,-3336 2540,-3336 2599,-3277 C16.2 ; U4.1@2731,-3149 U4.2@2781,-3149 ; C16.2@2767,-3277 C16.2@2776,-3268 ; C16.2@2779,-3268 U4.2@2779,-3165 ; U4.2@2779,-3156 U4.2
D1: R52.2 U5.13 | length 413.5
  Top Layer w12: R52.2 1637,-3011 1651.25,-2996.75 U5.13
D2: R47.2 U5.14 | length 317.6
  Top Layer w12: R47.2@1700,-3028.24 U5.14
FAN: R61.2 U5.32 | length 2648.5
  Top Layer w12: U5.32@2331.59,-2871 v7(2411,-2871) ; v7(2650,-3322) 2650,-3380 2666,-3396 4236,-3396 4341,-3291 R61.2
  Bottom Layer w12: v7(2411,-2871) 2609,-2871 2650,-2912 v7(2650,-3322)
GND: C1.2 C2.2 C4.2 C8.2 C9.1 C10.1 C11.1 C12.1 C13.1 C14.2 C15.2 C16.1 C17.1 C19.1 C20.2 C22.2 C23.2 C25.2 C26.1 C27.2 C28.2 C29.2 C30.2 C31.1 C32.2 C33.1 C34.1 C35.1 C36.2 C38.2 C39.2 C41.1 C42.1 C43.1 C44.1 C45.1 D9.2 D10.2 D11.2 D13.1 D14.2 P2.2 P6.1 P7.1 P8.3 P11.2 pad.0 pad.1 pad.2 pad.3 Q9.3 Q14.1 Q15.1 Q21.1 Q22.1 R41.2 R43.1 R46.2 R63.2 T2.3 T4.3 T6.3 T8.3 T10.3 T12.3 U1.4 U2.3 U3.4 U4.4 U5.3 U5.5 U5.21 U6.0 U6.7 U8.7 U9.1 | length 8402.1
  Top Layer w20: 2735,-3345 C17.1 ; U6.0@3857,-2077 U6.7
  Top Layer w25: 120,-2930 208.11,-2930 P7.1@210,-2928.11 ; 210,-3280 P2.2 210,-3150 ; 2930,-2770 2930,-2570
  Top Layer w30: 918,-413 1057,-413 ; 1011,-455 1011,-316 ; 1955,-413 2094,-413 ; 2050,-456 2050,-317 ; 3177,-420 3316,-420 ; C4.2@3268,-1725 3268,-1586 ; 3269,-469 3269,-330 ; 4040,-2710 4040,-2610 ; 4320,-2430 4420,-2430 ; 4370,-2470 4370,-2370
  Top Layer w35: 3863.08,-1852.99 4053.08,-1852.99 ; 3940,-1920 3940,-1730 ; 4290,-1850 4430,-1850 ; 4353,-1922 4353,-1732
  Top Layer w60: 4097,-1386 C28.2 ; 4099,-746 4319,-746 ; 4165,-1512 C28.2 ; 4165,-1292 C28.2 ; 4166,-840 4166,-620 ; 4317,-1386 C28.2
  Top Layer w70: 2973,-76 3574,-76 ; 2974,-271 3575,-271 ; 3100,-404 3100,23 ; 3489,-416 3489,11
  Bottom Layer w25: 1340,-3430 1340,-3300
  Bottom Layer w33: 4060,-1386 4241,-1386 ; 4065,-746 4246,-746 ; 4165,-1460 4165,-1325 ; 4165,-846 4165,-665
  Bottom Layer w70: 2979,-271 3579,-271 ; 2992,-75 3592,-75 ; 3099,-411 3099,16 ; 3489,-417 3489,10
  other v2: 2710,-3340 3600,-3300 3625,-3300 3650,-3300 2400,-3290 2545,-3270 2400,-3265 2705,-3235 1480,-3075 1480,-3050 1365,-2975 1365,-2950 3785,-2890 1900,-2800 1925,-2800 1490,-2790 3780,-2740 3900,-2295 3925,-2295 1758,-2283 3090,-2270 3090,-2240 4010,-2155 3060,-1970 570,-1840 1600,-1840 2660,-1840 570,-1810 1600,-1810 1750,-1700 50,-1690 80,-1690 110,-1690 1750,-1670 2660,-1670 1200,-1660 2770,-1660 2800,-1660 720,-1650 1600,-1650 2660,-1640 1170,-1630 1200,-1630 1230,-1630 720,-1620 1600,-1620 2660,-1610 1200,-1600 2370,-1600 2400,-1600 2430,-1600 2900,-1600 2930,-1600 2960,-1600 3140,-1400 3240,-1400 3140,-1370 3240,-1370 3140,-1340 3240,-1340 4330,-1130 4300,-1100 4330,-1100 4360,-1100 0,-1090 4330,-1070 0,-1060 0,-1030 0,-1000 1090,-960 2100,-960 3330,-950 1060,-930 1090,-930 1120,-930 2070,-930 2100,-930 2130,-930 3030,-930 3300,-920 3330,-920 3360,-920 1090,-900 2100,-900 3000,-900 3030,-900 3060,-900 3330,-890 3030,-870 3640,-700 3640,-670 3640,-640 4350,-430 4320,-400 4350,-400 4380,-400 4350,-370 100,-290 100,-260 100,-230 3300,-230 100,-200 1000,-200 2100,-200 3270,-200 3300,-200 3330,-200 1000,-170 2100,-170 3300,-170 970,-160 1030,-160 2070,-160 2130,-160 1000,-140 2100,-140 1000,-110 2100,-110
  other v3: 320,-1865 350,-1865 380,-1865 410,-1865 840,-1865 870,-1865 900,-1865 930,-1865 1360,-1865 1390,-1865 1420,-1865 1450,-1865 1880,-1865 1910,-1865 1940,-1865 1970,-1865 2400,-1865 2430,-1865 2460,-1865 2490,-1865 2920,-1865 2950,-1865 2980,-1865 3010,-1865 320,-1835 410,-1835 840,-1835 930,-1835 1360,-1835 1450,-1835 1880,-1835 1970,-1835 2400,-1835 2490,-1835 2920,-1835 3010,-1835 320,-1805 410,-1805 840,-1805 930,-1805 1360,-1805 1450,-1805 1880,-1805 1970,-1805 2400,-1805 2490,-1805 2920,-1805 3010,-1805 320,-1775 410,-1775 840,-1775 930,-1775 1360,-1775 1450,-1775 1880,-1775 1970,-1775 2400,-1775 2490,-1775 2920,-1775 3010,-1775 320,-1745 350,-1745 380,-1745 410,-1745 840,-1745 870,-1745 900,-1745 930,-1745 1360,-1745 1390,-1745 1420,-1745 1450,-1745 1880,-1745 1910,-1745 1940,-1745 1970,-1745 2400,-1745 2430,-1745 2460,-1745 2490,-1745 2920,-1745 2950,-1745 2980,-1745 3010,-1745
  other v4: -45,-3460 110,-3460 140,-3460 170,-3460 3350,-3360 4290,-3280 4290,-3250 1840,-3080 2860,-3040 3990,-2960 490,-2880 3580,-2880 3580,-2860 1690,-2810 1710,-2810 490,-2750 -30,-2680 -30,-2650 490,-2650 2630,-2640 720,-2600 2770,-2600 2790,-2600 490,-2590 720,-2570 3080,-2570 3100,-2570 190,-2490 580,-2450 610,-2450 220,-2380 1050,-2290 3550,-2290 1480,-2270 2060,-2270 2080,-2270 2100,-2270 1050,-2260 2530,-2250 1050,-2230 2530,-2220 3830,-2200 3860,-2200 1480,-2130 250,-2120 404,-2120 1310,-2120 1480,-2110 2325,-2110 2346.1,-2110 1310,-2100 440,-2050 1490,-2010 1490,-1990 -40,-1940 -20,-1940 0,-1940
  other v5: 3990,-3200 3050,-3190 3080,-3190 3110,-3190 3950,-3150 3990,-3150 4030,-3150 3430,-3100 3990,-3100 3430,-3070 3430,-3040 2960,-2900 2990,-2900 3200,-2900 3230,-2900 3780,-2650 3320,-2560 3500,-2430 3530,-2430 3560,-2430 3360,-2160 3390,-2160 3500,-2160 3590,-2150 3670,-2140 3310,-1960 3310,-1940 3560,-1850 3800,-1700 3830,-1700 3800,-1670 3830,-1670 3260,-1620 3290,-1620 3430,-1610 3460,-1610 3430,-1580 3460,-1580
  other v6: 690,-3460 720,-3460 1290,-3460 1320,-3460 3810,-3460 3830,-3460 3980,-3460 4010,-3460 2360,-3400 2390,-3400 2420,-3400 840,-3370 870,-3370 1200,-3360 840,-3340 870,-3340 1200,-3330 2040,-3290 1830,-3280 1940,-3260 1830,-3250 1330,-3230 1940,-3230 1330,-3200 700,-3160 700,-3130 700,-3100 2270,-3020 50,-3010 80,-3010 2183,-2980 2360,-2810 2360,-2780 2170,-2720 2200,-2720 2230,-2720
HA: U5.25 U8.12 | length 1375.1
  Top Layer w10: U8.12@1106,-2866 1192,-2866 1441,-3115 v7(1505,-3115) ; v7(2355,-3115) U5.25@2355,-3092
  Bottom Layer w10: v7(1505,-3115) v7(2355,-3115)
HB: U5.24 U8.10 | length 1317.8
  Top Layer w10: U8.10@1117,-2966 1221,-2966 1404,-3149 v7@1497,-3149 ; U5.24@2295,-3150 v7@2327,-3150
  Bottom Layer w10: v7(1496,-3150) v7(2326,-3150)
HC: U5.23 U8.8 | length 1248.2
  Top Layer w10: U8.8@1103,-3068 1256,-3068 1378,-3190 v7(1495,-3190) ; v7@2261.74,-3189.74 v7(2262,-3190) 2261.74,-3190 U5.23@2261.74,-3152
  Bottom Layer w10: v7(1495,-3190) v7(2262,-3190)
M8_DOG: U2.6 U5.11 | length 430.2
  Top Layer w12: U2.6 1713,-2852 1794,-2933 U5.11@2020,-2933
M8_RST: P1.1 U2.7 U5.29 | length 1554.3
  Top Layer w10: U5.29@2345,-2965 U5.29@2348.36,-2965.02
  Top Layer w12: v7(1504,-3004) 1504,-2838 1540,-2802 U2.7 ; P1.1@1722.5,-3362.5 1777,-3308 1777,-3088 v7@1806.78,-3058.22 ; v7(2191,-3031) 2257,-2965 U5.29@2349,-2965
  Bottom Layer w12: v7(1504,-3004) 1531,-3031 v7(2191,-3031) ; v7(1807.56,-3059) 1807.56,-3031
MISO: P1.3 U5.16 | length 310.8
  Top Layer w12: P1.3@1919,-3359 1925,-3359 2011,-3273 U5.16@2011,-3089.81
NetC3_1: C3.1 D1.2 D2.1 | length 206
  Top Layer w30: C3.1@3490,-1944 D1.2@3490,-1738
NetC3_2: C3.2 Q3.1 Q9.1 | length 251.9
  Top Layer w20: Q9.1 C3.2@3390.64,-1931.6 ; Q9.1@3396.69,-2034.6 Q3.1
NetC5_1: C5.1 D5.2 Q6.1 R5.2 T1.1 T3.1 | length 2216.2
  Top Layer w12: T1.1 165,-984 195,-954 655,-954 685,-984 T3.1 ; R5.2@487.6,-2201 D5.2@487.6,-1983 ; 487.6,-2053 637,-2053 657.6,-2073.6 Q6.1 ; D5.2@514,-1994 514,-954
NetC6_1: C6.1 D6.2 Q7.1 R6.2 T5.1 T7.1 | length 2171.1
  Top Layer w12: T5.1@1206,-1089 1205.93,-1085.52 1205,-1041 1205,-985 1231,-959 1697,-959 1725,-987 T7.1@1725,-1082 ; R6.2@1547,-2177 1547,-962 ; R6.2@1548,-2191 R6.2@1547.98,-2189 ; 1550,-2054 1707,-2054 1717.6,-2064.6 Q7.1
NetC9_2: C9.2 Q14.3 R18.2 R20.2 R27.2 | length 304.9
  Top Layer w12: C9.2@315,-2054 335,-2074 Q14.3@335,-2104
  Top Layer w15: R20.2@128.36,-2036 R27.2@375,-2036
NetC11_2: C11.2 Q15.3 R19.2 R21.2 R28.2 | length 313.5
  Top Layer w12: C11.2@1363,-2051 1385,-2073 Q15.3@1385,-2109
  Top Layer w15: R21.2@1173.64,-2034 R28.2@1420,-2034
NetC17_2: C17.2 R31.1 U4.3 | length 158
  Top Layer w12: 2831,-3257 U4.3@2831,-3166
  Top Layer w15: C17.2@2828,-3277 R31.1
NetC18_1: C18.1 D8.2 Q18.1 R33.2 T9.1 T11.1 | length 2228.9
  Top Layer w12: 2604,-2052 2762,-2052 2776,-2066 Q18.1@2776,-2095
  Top Layer w15: T9.1@2244,-1091 2244.11,-1085.52 2245,-1041 2245,-962 2268,-939 2730,-939 2765,-974 T11.1@2765,-1086 ; R33.2@2603,-2179 2603,-941.96
NetC19_2: C19.2 Q21.3 R38.2 R39.2 R45.2 | length 308.2
  Top Layer w12: C19.2@2397,-2056 2415,-2074 Q21.3@2415,-2110.4
  Top Layer w15: R39.2@2208.64,-2034 R45.2@2455,-2034
NetC20_1: C20.1 U5.7 Y1.2 | length 446.1
  Top Layer w12: U5.7@2104,-2813 2104,-2665 2126,-2643 C20.1@2393,-2643
NetC22_1: C22.1 U5.8 Y1.1 | length 353.7
  Top Layer w12: C22.1@1869,-2643 2033,-2643 2071.76,-2681.76 U5.8@2071.76,-2816.65
NetC24_1: C24.1 D13.2 L1.1 U6.8 | length 40
  Top Layer w18: C24.1@3894,-1966 3934,-1966
NetC24_2: C24.2 U6.1 | length 117.8
  Top Layer w12: U6.1@3750,-2020 3750,-1971 3764,-1957 C24.2
NetC25_1: C25.1 U5.20 | length 114
  Top Layer w12: C25.1@2168,-3261 U5.20@2168,-3147
NetC30_1: C30.1 R44.1 U6.6 | length 164.4
  Top Layer w12: U6.6 3994,-2127 4027,-2094 R44.1@4108,-2094
NetC31_2: C31.2 R44.2 | length 81
  Top Layer w12: C31.2@4117,-2225 R44.2@4117,-2144
NetC33_2: C33.2 R56.1 U8.5 | length 356.7
  Top Layer w15: C33.2@613,-3036 613,-2981 764,-2981 782,-2963 901.54,-2963 U8.5@905.54,-2967
NetC34_2: C34.2 R57.1 U8.3 | length 382.2
  Top Layer w15: R57.1@612,-2816 C34.2@612,-2749 ; R57.1 721,-2810 778,-2867 U8.3@905.54,-2867
NetC35_2: C35.2 R58.1 U8.1 | length 399.9
  Top Layer w15: R58.1@613,-2645 711,-2645 830,-2764 891,-2764 U8.1@895,-2768 ; R58.1@615,-2655 C35.2@615,-2588
NetC38_1: C38.1 U9.5 | length 111
  Top Layer w12: U9.5@3532,-2762 C38.1@3643,-2762
NetC39_1: C39.1 R60.1 U9.2 U9.6 | length 460.7
  Top Layer w12: U9.2@3319.06,-2661 3324.06,-2656 3399,-2656 3449,-2706 C39.1@3644,-2706 ; 3386,-2655 R60.1@3386,-2542
NetC43_2: C43.2 R62.1 R63.1 U4.5 | length 273
  Top Layer w15: U4.5@2885,-2964 R62.1@3056,-2964 ; R63.1 R62.1@3064.6,-2945
NetD3_1: D3.1 Q1.3 Q6.2 R11.2 | length 479.6
  Top Layer w12: Q6.2@733,-2096 907,-2096 918,-2107 Q1.3@918,-2282 ; D3.1@826,-2104 R11.2@826,-1989
NetD3_2: D3.2 R5.1 | length 312.3
  Top Layer w12: R5.1 562.4,-2228.4 574,-2240 798,-2240 D3.2@821,-2217
NetD4_1: D4.1 Q2.3 Q7.2 R12.2 | length 421.4
  Top Layer w15: Q7.2@1797,-2097 1967,-2097 1980,-2110 Q2.3@1980,-2289 ; D4.1@1887,-2059 R12.2@1887,-2005
NetD4_2: D4.2 R6.1 | length 305
  Top Layer w12: R6.1@1622.4,-2200 1622.4,-2230.4 1635,-2243 1855,-2243 D4.2@1881,-2217
NetD7_1: D7.1 Q16.3 Q18.2 R35.2 | length 436
  Top Layer w15: Q18.2@2851.96,-2096.6 3018.6,-2096.6 3032,-2110 Q16.3@3032,-2298 ; D7.1@2947.6,-2067.04 R35.2@2947.6,-2004.64
NetD7_2: D7.2 R33.1 | length 331.6
  Top Layer w12: R33.1@2673.6,-2182.64 2673.6,-2236.6 2683,-2246 2912,-2246 D7.2@2937,-2221
NetD9_1: D9.1 F1.2 U6.2 | length 470.6
  Top Layer w40: 3678,-2072 3683,-2077 U6.2
  Top Layer w60: F1.2@3622,-1698.85 3622,-2022 3672,-2072 3678,-2072
NetD10_1: D10.1 R49.1 | length 68
  Top Layer w12: R49.1 D10.1@3643,-2859
NetD11_1: D11.1 R52.1 | length 66
  Top Layer w12: D11.1@1637,-3172 R52.1
NetD12_1: D12.1 P9.2 Q22.3
NetD14_1: D14.1 R47.1 | length 66
  Top Layer w12: D14.1@1697,-3174.83 R47.1@1697,-3108.83
NetP7_4: P7.4 R55.1 R58.2 | length 285
  Top Layer w15: P7.4@329,-2693 R55.1@547,-2693 ; R55.1@545,-2710 R58.2@545,-2643
NetP7_5: P7.5 R54.1 R57.2 | length 295
  Top Layer w15: P7.5@323,-2812 R57.2@551,-2812 ; R54.1@544,-2867 R57.2@544,-2800
NetP7_6: P7.6 R53.1 R56.2 | length 285
  Top Layer w15: P7.6@316,-2929 R53.1@534,-2929 ; R56.2@544,-2979 R53.1@544,-2912
NetQ1_2: Q1.2 Q4.3 R1.1 | length 240.3
  Top Layer w12: Q4.3@715.36,-2338 752,-2338 780,-2310 867,-2310 877.6,-2320.6 Q1.2
NetQ2_2: Q2.2 Q5.3 R2.1 | length 246.3
  Top Layer w12: Q5.3@1783.5,-2337.04 Q5.3@1784,-2337 ; Q5.3@1787,-2342.4 1787,-2316 1798,-2305 1924,-2305 1943,-2324 Q2.2@1943,-2375
NetQ3_2: Q3.2 Q8.3 Q9.2 R7.1 | length 482.9
  Top Layer w15: R7.1@3307,-2218 3307,-2123 3320.6,-2109.4 Q3.2 ; Q8.3@3550,-2253 Q3.2@3550,-2109.4
NetQ4_1: Q4.1 R13.2 | length 69
  Top Layer w12: R13.2@562.36,-2376 Q4.1@631.36,-2376
NetQ4_2: Q4.2 R8.1 | length 78
  Top Layer w12: R8.1@553.36,-2301 Q4.2@631.36,-2301
NetQ5_1: Q5.1 R14.2 | length 51
  Top Layer w12: R14.2@1637,-2377 Q5.1@1688,-2377
NetQ5_2: Q5.2 R9.1 | length 51
  Top Layer w12: R9.1@1637,-2301 Q5.2@1688,-2301
NetQ8_1: Q8.1 R17.2 | length 158.2
  Top Layer w12: R17.2@3414,-2416 3447,-2416 3462,-2401 Q8.1@3462,-2297
NetQ8_2: Q8.2 R10.1 | length 79.9
  Top Layer w20: R10.1 Q8.2@3466.94,-2214.6
NetQ10_2: Q10.2 Q12.3 R15.2 | length 164.7
  Top Layer w12: Q10.2@138,-2192.6 138,-2325 146,-2333 Q12.3@167,-2333
NetQ10_3: Q10.3 R20.1 | length 298.7
  Top Layer w12: R20.1@135,-1959 134.83,-1959.01 134.84,-1961.6 134.86,-1963.86 130.1,-1959.1 89.9,-1959.1 80,-1969 80,-2099 90,-2109 175,-2109 Q10.3
NetQ11_2: Q11.2 Q13.3 R16.2 | length 167.5
  Top Layer w12: Q11.2 1187.6,-2321.6 1200,-2334 Q13.3@1221,-2334
NetQ11_3: Q11.3 R21.1 | length 286.9
  Top Layer w12: R21.1 1137.4,-1961.6 1125,-1974 1125,-2089 1141.36,-2105.36 Q11.3
NetQ12_1: Q12.1 R22.2 | length 162.6
  Top Layer w12: Q12.1@215,-2433 287,-2433 299.6,-2420.4 R22.2@299.6,-2347.64
NetQ13_1: Q13.1 R23.2 | length 157.4
  Top Layer w12: Q13.1@1267,-2433 1333,-2433 1347.6,-2418.4 R23.2@1347.6,-2347.64
NetQ14_2: Q14.2 R25.1 | length 62.4
  Top Layer w12: R25.1@297.6,-2255.04 Q14.2
NetQ15_2: Q15.2 R26.1 | length 62.4
  Top Layer w12: R26.1@1347.6,-2255.04 Q15.2
NetQ16_2: Q16.2 Q17.3 R32.1 | length 247.3
  Top Layer w12: Q17.3@2842,-2339 2842,-2311 2852.4,-2300.6 2974.6,-2300.6 2989,-2315 Q16.2@2989,-2377
NetQ17_1: Q17.1 R36.2 | length 62.4
  Top Layer w15: R36.2@2677.96,-2376.6 Q17.1@2740.36,-2376.6
NetQ17_2: Q17.2 R34.1 | length 62.4
  Top Layer w15: R34.1@2683.96,-2301.6 Q17.2@2746.36,-2301.6
NetQ19_2: Q19.2 Q20.3 R37.2 | length 165.4
  Top Layer w12: Q19.2 2217.6,-2326.6 2225,-2334 Q20.3@2246,-2334
NetQ19_3: Q19.3 R39.1 | length 284
  Top Layer w12: R39.1 2167.4,-1961.6 2155,-1974 2155,-2084 2176.36,-2105.36 Q19.3
NetQ20_1: Q20.1 R40.2 | length 156.8
  Top Layer w12: Q20.1@2296,-2432 2362,-2432 2377.6,-2416.4 R40.2@2377.6,-2347.64
NetQ21_2: Q21.2 R42.1 | length 62.4
  Top Layer w12: R42.1@2377.6,-2255.04 Q21.2
NetQ22_2: Q22.2 R61.1 | length 79.4
  Top Layer w12: R61.1@4270,-3190 Q22.2@4270,-3110.64
NetR18_1: R18.1 T2.1 | length 170.7
  Top Layer w12: T2.1@165,-1809 165,-1859 215,-1909 R18.1@215,-1959
NetR19_1: R19.1 T6.1 | length 149
  Top Layer w12: T6.1@1207,-1832 1207,-1866 1265,-1924 R19.1@1265,-1957
NetR24_1: R24.1 U2.4 | length 89.6
  Top Layer w12: R24.1@1319,-2899 U2.4@1408.64,-2899
NetR27_1: R27.1 T4.1 | length 430
  Top Layer w12: R27.1@395,-1949 v7(425,-1949) ; v7(685,-1949) T4.1@685,-1809
  Bottom Layer w12: v7(425,-1949) v7(685,-1949)
NetR28_1: R28.1 T8.1 | length 415.7
  Top Layer w12: R28.1@1430,-1961.6 1438.6,-1953 1469,-1953 1480,-1942 v8@1480,-1940 ; T8.1@1724,-1800 T8.1@1724.11,-1805.55 ; v8(1734,-1935) T8.1@1734,-1833
  Bottom Layer w12: v8@1485,-1936 v8@1733,-1936
  other v8: 1483,-1937
NetR30_1: R30.1 R43.2 U6.5 | length 165.6
  Top Layer w12: R43.2 R30.1 3898,-2222 U6.5@3943,-2177
NetR31_2: R31.2 U3.5 | length 682.2
  Top Layer w12: R31.2@2901,-3350 3297,-3350 3452,-3195 U3.5@3519,-3195
NetR38_1: R38.1 T10.1 | length 177.5
  Top Layer w12: T10.1@2246.4,-1799.96 2246.4,-1868.4 2279,-1901 R38.1@2279,-1964
NetR41_1: R41.1 U6.4 | length 258.3
  Top Layer w12: R41.1 3702,-2307 3678,-2283 3678,-2190 3691,-2177 U6.4@3753,-2177
NetR45_1: R45.1 T12.1 | length 442.1
  Top Layer w12: R45.1@2451.64,-1962.4 v8@2514.04,-1962.4 ; v8(2773,-1928) T12.1@2773,-1820.6
  Bottom Layer w12: v8@2513,-1961 2545,-1929 v8@2772,-1929
  other v8: 2513,-1962
NetR59_1: R59.1 R60.2 U9.7 | length 297
  Top Layer w12: R60.2@3453,-2536 3453,-2639 3470,-2656 R59.1@3640,-2656
NetU2_1: U2.1 U2.8 | length 186.6
  Top Layer w12: U2.1@1431.36,-2751 U2.8@1618,-2751
NetU8_2: U8.2 U8.13 | length 127.5
  Top Layer w15: U8.2@939,-2818 U8.13@1066.54,-2818
NetU8_4: U8.4 U8.11 | length 127.5
  Top Layer w15: U8.4@940,-2916 U8.11@1067.54,-2916
NetU8_6: U8.6 U8.9 | length 127.5
  Top Layer w15: U8.6@942,-3016 U8.9@1069.54,-3016
QEA: P2.4 R4.2 U5.1 | length 2245.6
  Top Layer w12: P2.4 330,-3345 400,-3275 1190,-3275 v7(1274,-3191) ; v2@2280,-2935 2293.24,-2921.76 U5.1
  Bottom Layer w12: v7(1274,-3191) 1530,-2935 v2(2279,-2935)
QEB: P2.3 R3.2 U5.2 | length 2130.6
  Top Layer w12: P2.3 1187.11,-3226.89 v7(1257.1,-3156.9) ; v2(2243,-2906) 2261,-2888 U5.2@2261,-2832 ; U5.2@2262,-2817 U5.2@2261.99,-2815.64
  Bottom Layer w12: v7(1257.1,-3156.9) 1508,-2906 v2(2243,-2906)
SCK: P1.4 U5.17 | length 220.1
  Top Layer w12: P1.4@2020.5,-3360.5 2074,-3307 U5.17@2074,-3162.59
SIG: P8.1 R46.1 U5.12 | length 845.6
  Top Layer w12: P8.1 1542,-3011 1587.75,-2965.25 U5.12
STEUER_A+: R13.1 U5.30 | length 2539
  Top Layer w12: R13.1 487.6,-2478.6 503,-2494 962,-2494 1036,-2568 v12(1389,-2568) ; v12(1465,-2568) 2428,-2568 2452,-2592 2452,-2917 2435,-2934 U5.30@2354,-2934
  Bottom Layer w12: v12@1390,-2568 v12@1464,-2568
STEUER_A-: R22.1 R25.2 U5.10 | length 2167.7
  Top Layer w12: R25.2 372.4,-2499.4 393,-2520 930,-2520 1044,-2634 1750,-2634 1775,-2659 1775,-2858 1820,-2903 U5.10@2026,-2903
STEUER_B+: R14.1 U5.28 | length 1632.7
  Top Layer w12: R14.1@1548,-2382 1548,-2522 1566,-2540 2444,-2540 2477,-2573 2477,-2980 2460.25,-2996.75 U5.28
STEUER_B-: R23.1 R26.2 U5.9 | length 1137.7
  Top Layer w12: R26.2 1422.4,-2586.4 1439,-2603 1770,-2603 1801,-2634 1801,-2831 1841,-2871 2008,-2871 U5.9@2009,-2870
STEUER_C+: R36.1 U5.27 | length 878.5
  Top Layer w12: U5.27 2560.76,-3028.24 2592,-2997 2592,-2385 R36.1@2599,-2378
STEUER_C-: P1.2 R40.1 R42.2 U5.15 | length 1753.6
  Top Layer w12: P1.2@1821,-3362 1877,-3306 1877,-3085 1902.26,-3059.74 v7@2084,-3059.74 ; R42.2@2441,-2268 2441,-2463 2517,-2539 v7(2517,-2996)
  Bottom Layer w12: v7(2084,-3060) 2482,-3060 2517,-3025 v7(2517,-2996)
TEMP: P11.1 R48.1 U5.26 | length 827
  Top Layer w12: U5.26@2356,-3060 2588,-3060 2637,-3011 2637,-2701 2658,-2680 P11.1@2844,-2680
VCC: C13.2 C15.1 C28.1 C29.1 D1.1 F1.1 P10.1 R29.2 R62.2 U3.1 U3.2 | length 2111
  Top Layer w15: R62.2@3148,-2957 v2(3148,-1529)
  Top Layer w20: R62.2@3148,-2957 C15.1@3314,-2957 ; U3.2@3326,-3089 C15.1@3326,-2945
  Top Layer w30: D1.1@3371,-1741 3371,-1525
  Bottom Layer w15: v2@3148,-1528 v15(3305,-1528)
VH: C4.1 D2.2 Q1.1 Q2.1 Q16.1 R1.2 R2.2 R32.2 | length 3794.6
  Top Layer w18: R1.2@800,-2387 800,-2422 818,-2440 v8(952,-2440) ; v8@952,-2441 952.4,-2441 Q1.1@952.4,-2389 ; R2.2@1872,-2376.4 1872,-2425 1889,-2442 1993,-2442 2018,-2417 2018,-2383.6 Q2.1@2017.4,-2383 ; R32.2@2916,-2375 2916,-2427 2931,-2442 3044,-2442 3068,-2418 3068,-2385.24 Q16.1@3069,-2384.24
  Top Layer w25: v14@3240,-2409 3240,-1940 3267.71,-1912.29 C4.1@3267.71,-1838
  Top Layer w30: C4.1@3277,-1839 D2.2@3380,-1839
  Bottom Layer w15: 2017,-2445 v8@2017,-2415 ; 3068,-2443 v8@3068,-2413
  Bottom Layer w25: v8@951,-2440 3211,-2440 v14@3240.5,-2410.5
  other v8: 2017,-2418 3068,-2416
  other v14: 3240,-2410
VP: C1.1 C2.1 C14.1 R29.1 T1.2 T3.2 T5.2 T7.2 T9.2 T11.2 U3.8 | length 2928.7
  Top Layer w15: 3163.77,-738.23 3190,-764.46 3190,-2790 3246,-2846 3500,-2846 3533,-2879 U3.8@3533,-3045
  Top Layer w30: T5.2@1128.12,-501.12 C1.1@1128.12,-406 ; T9.2@2160.12,-501.12 C2.1@2160.12,-406 ; 3383,-558 C14.1@3383,-428
VSA: C42.2 U4.6 U4.7 U5.22 | length 768.3
  Top Layer w12: U5.22@2229,-3157.61 2229,-3210 2242,-3223 2530,-3223 2686,-3067 2759,-3067 2778,-3048 U4.7@2778,-2959
pads on no net: P7.2 U2.5 U3.3 U3.6 U3.7 U5.31 U6.3

## Polygon pours and split planes (outlines as drawn)
NetD12_1 on Top Layer "Bottom Layer-No Net" (solid, remove dead copper, pour order 1009): 4333,-2879 4404,-2879 4403,-2880 4403,-3044 4283,-3044 4282,-3045 4284,-3043 4284,-2986 4314,-2986 4315,-2985 4327,-2973 4327,-2879
GND on Top Layer "Bottom Layer-No Net" (solid, remove dead copper, pour order 1008): 2530,-1740 3160,-1740 3200,-1780 3220,-1800 3220,-2390 2640,-2390 2610,-2420
GND on Top Layer "Bottom Layer-No Net" (solid, remove dead copper, pour order 1007): -193,-1897 685,-1897 4527,-1897 4597,-1967 4567,-1997 4567,-3637 -173,-3637 -203,-3607
GND on Top Layer "Bottom Layer-No Net" (solid, remove dead copper, pour order 1006): -480,220 -470,210 4750,210 4750,-1900 -220,-1900
GND on Bottom Layer "Bottom Layer-No Net" (solid, remove dead copper, pour order 1011): -153,-1887 4537,-1887 4587,-1937 4537,-1987 4537,-3617 -143,-3617
GND on Bottom Layer "Bottom Layer-No Net" (solid, remove dead copper, pour order 1010): -373,193 -343,223 4742,223 4742,-1912 4737,-1907 -168,-1907

## Keep-outs
Keep-Out Layer:
  lines w7.87: -95,-3462 -95,46 ; -57,-3502 4442,-3502 ; -57,86 4438,86 ; 4474.33,-3469 4474.33,49.67
  lines w8: -95,-3462 ccw(c-55,-3462) -55,-3502 ; -95,46 cw(c-55,46) -55,86 ; 4438,86 cw(c4438,49.67) 4474.33,49.67 ; 4440,-3502 ccw(c4440,-3467.67) 4474.33,-3467.67

## Other copper
Top Layer:
  rectangle net NetD12_1: 4322,-2943 4406,-2697
  rectangle net +5V: 3845,-2918 3980,-2633
  rectangle net +12V: 4039,-2959 4292,-2815
  rectangle net +12V: 4175,-2963.26 4283,-2175
  rectangle net NetC24_1: 4137,-2020 4253,-1802
  rectangle net NetC24_1: 3925,-2046 4402,-1956
  rectangle net NetD9_1: 3622,-1917 3823,-1791.98
  rectangle net VCC: 3675,-421 4210,-1
  region net VSA: 2772,-2937 2772,-2961 2830,-2961 2830,-2937
  rectangle net A: 255,-1387 472,-990
  rectangle net A: 772,-1390 989,-993
  rectangle net B: 1293,-1388 1510,-991
  rectangle net B: 1815,-1389 2032,-992
  rectangle net C: 2335,-1389 2552,-992
  rectangle net C: 2855,-1365 3072,-991
  rectangle net VCC: 3688,-1543 4049,-279
  rectangle net VCC: 3288,-1543 4026,-1031
  rectangle net VP: 139,-805 3592,-503
  rectangle net GND: 520,-3475 650,-3350
  rectangle net GND: 500,-3470 560,-3370
  rectangle net GND: 635,-3455 665,-3375
  rectangle net GND: 530,-3375 625,-3340
  rectangle net GND: 515,-3485 635,-3465
  rectangle net GND: 510,-3380 530,-3365
  rectangle net GND: 4330,-3475 4460,-3340
  rectangle net GND: 4300,-3485 4460,-3370
  rectangle net GND: 3930,-3360 4030,-3185
  rectangle net GND: 3835,-3175 4130,-3115
  rectangle net GND: 3945,-3040 4020,-2960
  rectangle net GND: 1021,-1929 1108,-1831
  rectangle net GND: 1766,-1917 1826,-1868
  pour cut-out: 4217,-1437 4217,-1332 4112,-1332 4112,-1437
  pour cut-out: 4220,-799 4220,-700 4213,-693 4112,-693 4112,-793 4106,-799
  pour cut-out: 3027,-197 3027,-347 3177,-347 3177,-197
  pour cut-out: 3417,-197 3417,-347 3567,-347 3567,-197
  pour cut-out: 3417,-2 3417,-152 3567,-152 3567,-2
  pour cut-out: 3027,-2 3027,-152 3177,-152 3177,-2
  pour cut-out: 3194.71,-1652.88 3194.71,-1802.88 3344.71,-1802.88 3344.71,-1652.88
  pour cut-out: 967,-367 1057,-367 1057,-457 967,-457
  pour cut-out: 2007,-367 2097,-367 2097,-457 2007,-457
  pour cut-out: 3227,-377 3317,-377 3317,-467 3227,-467
  pour cut-out: 3880,-1780 3880,-1908 3879,-1909 3880,-1910 4002,-1910 4002,-1782 4000,-1780
  pour cut-out: 4289.42,-1787 4289.42,-1915 4288.42,-1916 4289.42,-1917 4411.42,-1917 4411.42,-1789 4409.42,-1787
Bottom Layer:
  rectangle net +5V: 1170,-2514 1206,-2479
  rectangle net A: 65,-1519 975,-1209
  rectangle net B: 1105,-1519 2015,-1209
  rectangle net C: 2155,-1519 3065,-1209
  rectangle net C: 2275,-1489 2915,9
  rectangle net B: 1235,-1459 1885,9
  rectangle net A: 195,-1429 845,10
  rectangle net GND: 465,-3485 700,-3300
  rectangle net GND: 4295,-3485 4460,-3325
  rectangle net GND: 3363,-862 3516,-620
  rectangle net GND: 3302,-1253 3593,-1023
  rectangle net GND: 3479,-1828 3748,-1385
  pour cut-out: 4113,-1437 4113,-1332 4218,-1332 4218,-1437
  pour cut-out: 4113,-797 4113,-692 4218,-692 4218,-797
  pour cut-out: 3173,-2 3173,-152 3023,-152 3023,-2
  pour cut-out: 3173,-197 3173,-347 3023,-347 3023,-197
  pour cut-out: 3563,-197 3563,-347 3413,-347 3413,-197
  pour cut-out: 3563,-2 3563,-152 3413,-152 3413,-2

## Silkscreen, mask and mechanical layers (free items; w line width, h text height)
Top Overlay:
  lines w6: 455,-2080 455,-2070 595,-2070 595,-2075 595,-2415 455,-2415 ; 455,-2075 455,-2415 ; 510,-2415 510,-2600 400,-2600 400,-2415 455,-2415 ; 1157,-3374 1157,-3378.27 ccw(c1187.73,-3378.27) 1166,-3400 ccw(c1180.49,-3385.51) 1180.49,-3406 1256,-3406 ; 1242,-3420 1256,-3406 ; 1242,-3392 1256,-3406 ; 3715,-2210 3715,-2435 3865,-2435 3865,-2210 ; -85,-2070 -85,-1925 420,-1925 420,-2070 410,-2070 -85,-2070 ; 1003,-3374 1003,-3306 1158,-3306 1158,-3374 1003,-3374 ; 2560,-2625 2560,-2070 2705,-2070 2705,-2625 2560,-2625
  lines w7.87: 1515,-2620 1515,-2076 1515,-2071 1655,-2071 1655,-2076 1655,-2620
  lines w8: 1515,-2620 1655,-2620
  text "GND" at 3220,20 h78.74
  text "+48V" at 3880,20 h78.74
  text "A" at 105,-140 h160
  text "B" at 1140,-140 h160
  text "C" at 2180,-140 h160
  text "S" at 1104,-3359 h60
  text "-" at 1014,-3362 h100
  text "+" at 1052,-3364 h80
  text "OOP V1.2" at 3790,-3458 h100
  text "RS" at 1690,-3470 h60
  text "MO" at 1785,-3470 h60
  text "MI" at 1900,-3470 h60
  text "CK" at 1995,-3470 h60
Top Solder:
  rectangle: 2900,-1880 3040,-1740
  rectangle: 2380,-1880 2520,-1740
  rectangle: 1860,-1880 2000,-1740
  rectangle: 1340,-1880 1480,-1740
  rectangle: 820,-1880 960,-1740
  rectangle: 300,-1880 440,-1740
  rectangle: 250,-1271 480,-981
  rectangle: 760,-1271 1000,-981
  rectangle: 1290,-1321 1520,-981
  rectangle: 1810,-1281 2040,-981
  rectangle: 2320,-1331 2558,-981
  rectangle: 2840,-1271 3090,-981
  lines w40: 3869.72,-36.08 cw(c3874.08,-36.08) 3871,-33 ; 4128.59,-173 cw(c4128.59,-176.41) 4131,-174
  lines w50: 180,-678 cw(c208.97,-706.97) 208.97,-666
  lines w60: 116,-707 3352.03,-707 ; 3440,-1140 3760,-1140 ; 3753,-173 4128.59,-173 ; 3756.68,-1140.37 ccw(c3756.68,-1036.68) 3830,-1110 ; 3834.64,-1105.36 ccw(c3749.29,-1020) 3870,-1020 ; 3869.72,-1020 3869.72,-746 3869.72,-36.08